# EAGLE board tinkercad (EAGLE 9.7.0)

Size 219.29 x 154.2 mm. Coordinates in mm from the lower left corner, seen from the top.
Outline: 0,0 219.29,0 219.29,154.2 0,154.2 0,0
Copper layers (1*16): Top 0.035mm / dielectric 1.5mm / Bottom 0.035mm
Design rules "default": minimum track width 6mil, minimum drill 0.35mm, track to track 6mil, track to pad 6mil, pad to pad 6mil, via to via 6mil, smd to smd 6mil, copper to edge 40mil, drill to drill 6mil, minimum pad ring 10mil, minimum via ring 8mil, stop-mask expansion 4mil, vias tented up to drill 0mil, thermal gap 10mil

## Footprints (pad centres in the part's own frame; a part is rotated, then mirrored left to right if it is on the bottom)
LEDRD254W60D565H860B = drill 0.981 pad 1.581: 1 -1.27,0; 2 1.27,0
KS2E-M-DC5 = drill 0.8: 1 -8.89,-3.81; 4 -1.27,-3.81; 6 3.81,-3.81; 8 8.89,-3.81; 9 8.89,3.81; 11 3.81,3.81; 13 -1.27,3.81; 16 -8.89,3.81
RESAD1016W63L850D250B = drill 0.83 pad 1.43: 1 -5.08,0; 2 5.08,0
SWITCH-MOMENTARY-PTH-6.5MM = drill 1.016 pad 1.88: 1 -3.251,2.261; 2 3.251,2.261; 3 -3.251,-2.261; 4 3.251,-2.261
ARDUINO-UNO-R3-SHIELD = drill 1.016 pad 1.88: 3.3V 24.13,-2.54; 5V 24.13,0; A0 24.13,12.7; A1 24.13,15.24; A2 24.13,17.78; A3 24.13,20.32; A4 24.13,22.86; A5 24.13,25.4; AREF -24.13,-13.97; D2 -24.13,20.32; D3 -24.13,17.78; D4 -24.13,15.24; D5 -24.13,12.7; D6 -24.13,10.16; D7 -24.13,7.62; D8 -24.13,3.81; D9 -24.13,1.27; D10 -24.13,-1.27; D11 -24.13,-3.81; D12 -24.13,-6.35; D13 -24.13,-8.89; GND@0 24.13,2.54; GND@1 24.13,5.08; GND@2 -24.13,-11.43; IOREF 24.13,-7.62; NC 24.13,-10.16; RES 24.13,-5.08; RX -24.13,25.4; SCL -24.13,-19.05; SDA -24.13,-16.51; TX -24.13,22.86; VIN 24.13,7.62

## Placement (x,y rotation side)
D1  RED  [LEDRD254W60D565H860B]  212.24,131.66 180 top
DLED1  RED  [LEDRD254W60D565H860B]  202.18,131.09 180 top
KRELAY  RELAY-DPDT_KS2E  [KS2E-M-DC5]  177.5,144.04 180 top
R1  1k  [RESAD1016W63L850D250B]  154.54,85.76 180 top
R3  200  [RESAD1016W63L850D250B]  212.96,93.38 270 top
R5  200  [RESAD1016W63L850D250B]  192.64,93.38 270 top
SBUTTON2  SWITCH_MOMENTARY  [SWITCH-MOMENTARY-PTH-6.5MM]  146.92,92.11 90 top
U1  ARDUINO-UNO-R3-SHIELD  [ARDUINO-UNO-R3-SHIELD]  47.88,29.84 270 top

## Library data of the parts
D1 DLED1 = Tinkercad; CATEGORY: Opto-Electronic; SUB-CATEGORY: LED; VALUE: LED_RED
KRELAY R1 R3 R5 SBUTTON2 U1 = Tinkercad

## Nets
D1_A: D1.1 R3.1
DLED1_A: DLED1.1 R5.1
U1_5V: SBUTTON2.1 SBUTTON2.2 U1.5V
U1_D2: R1.2 SBUTTON2.3 SBUTTON2.4 U1.D2
U1_D5: R3.2 U1.D5
U1_D6: R5.2 U1.D6
U1_GND: D1.2 DLED1.2 R1.1 U1.GND@0 U1.GND@1 U1.GND@2

## Tracks (layer width: path | path; a pad name or v marks a point on that pad's centre or on a via)
D1_A  (1 unrouted)
DLED1_A  (1 unrouted)
U1_5V  (2 unrouted)
U1_D2  (3 unrouted)
U1_D5  (1 unrouted)
U1_D6  (1 unrouted)
U1_GND  (5 unrouted)